# Altium PCB ElectroOpamps.PcbDoc
Units mm, origin at the board's own origin, x right, y up, seen from the top; angles counter-clockwise.
Board outline 46 x 32 mm, 2 copper layers (Top Layer, Bottom Layer); 10 components, 7 nets, 30 pads, 0 vias.
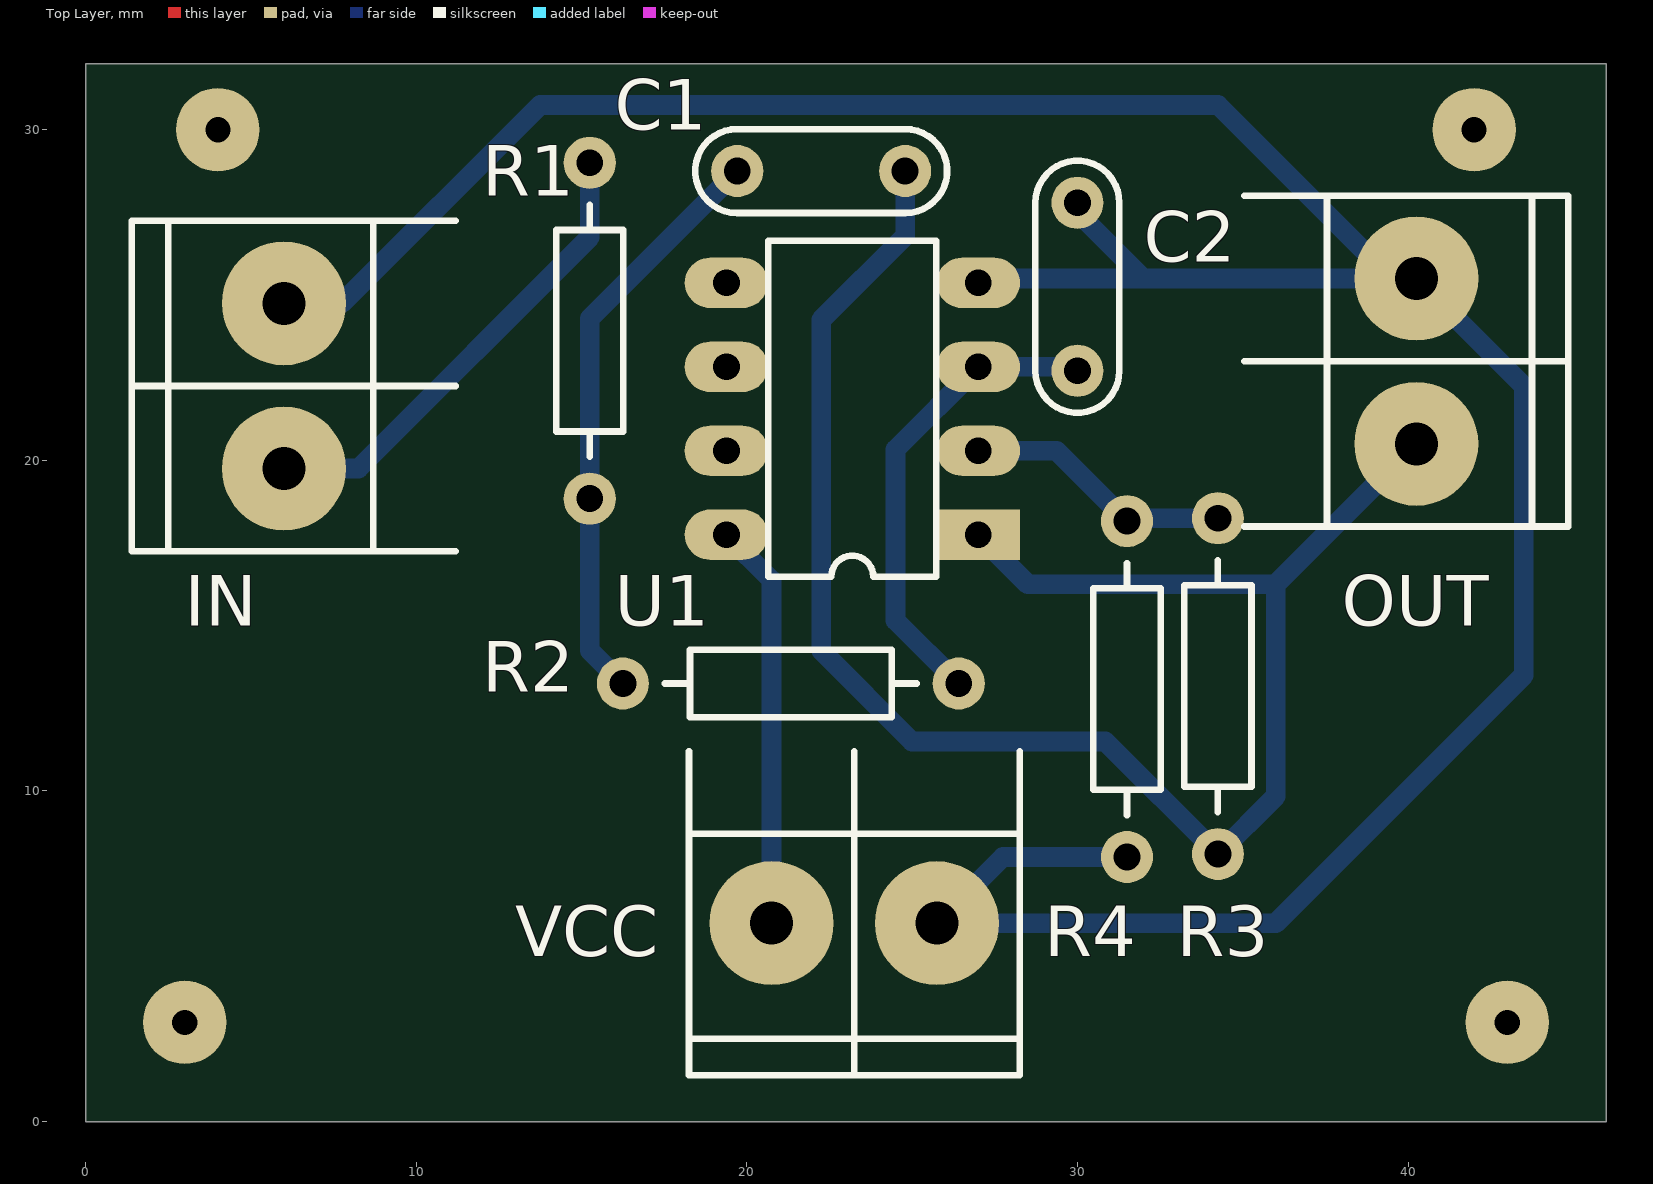
[diagram p0: Top Layer view]
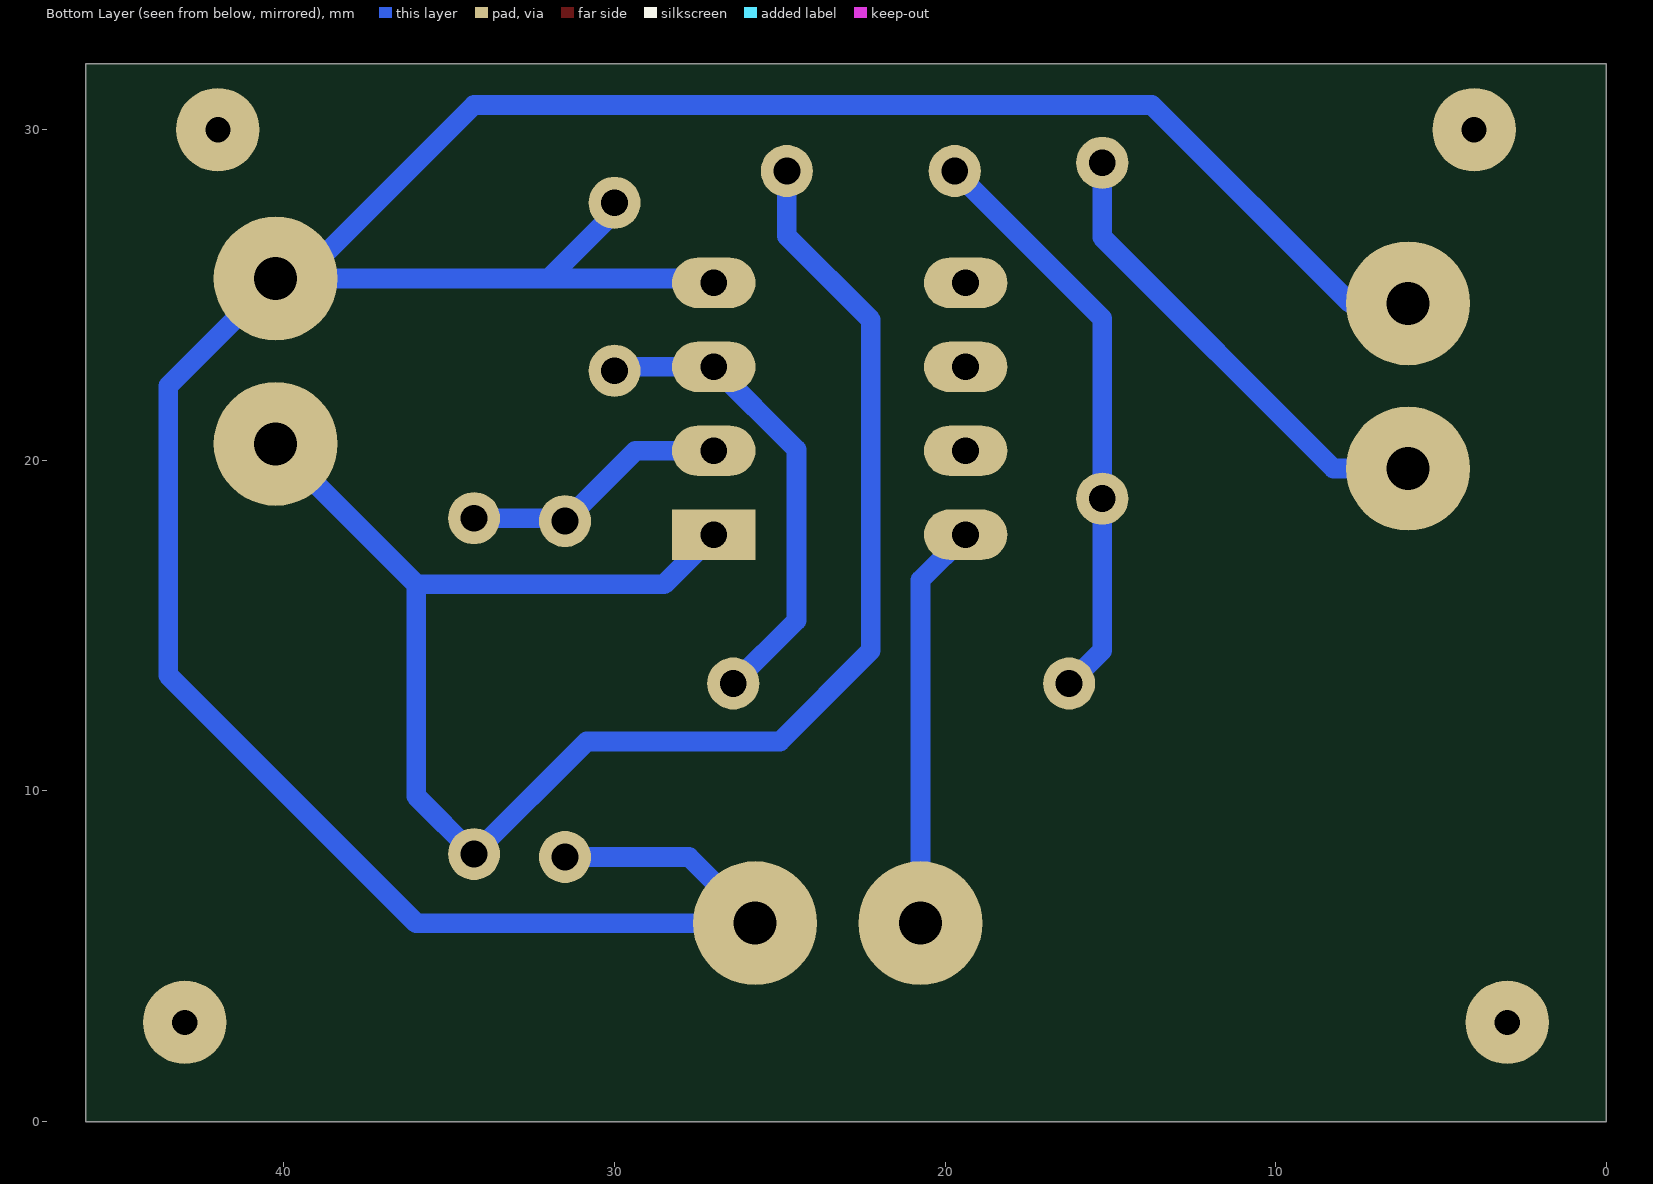
[diagram p1: Bottom Layer view, seen from below]
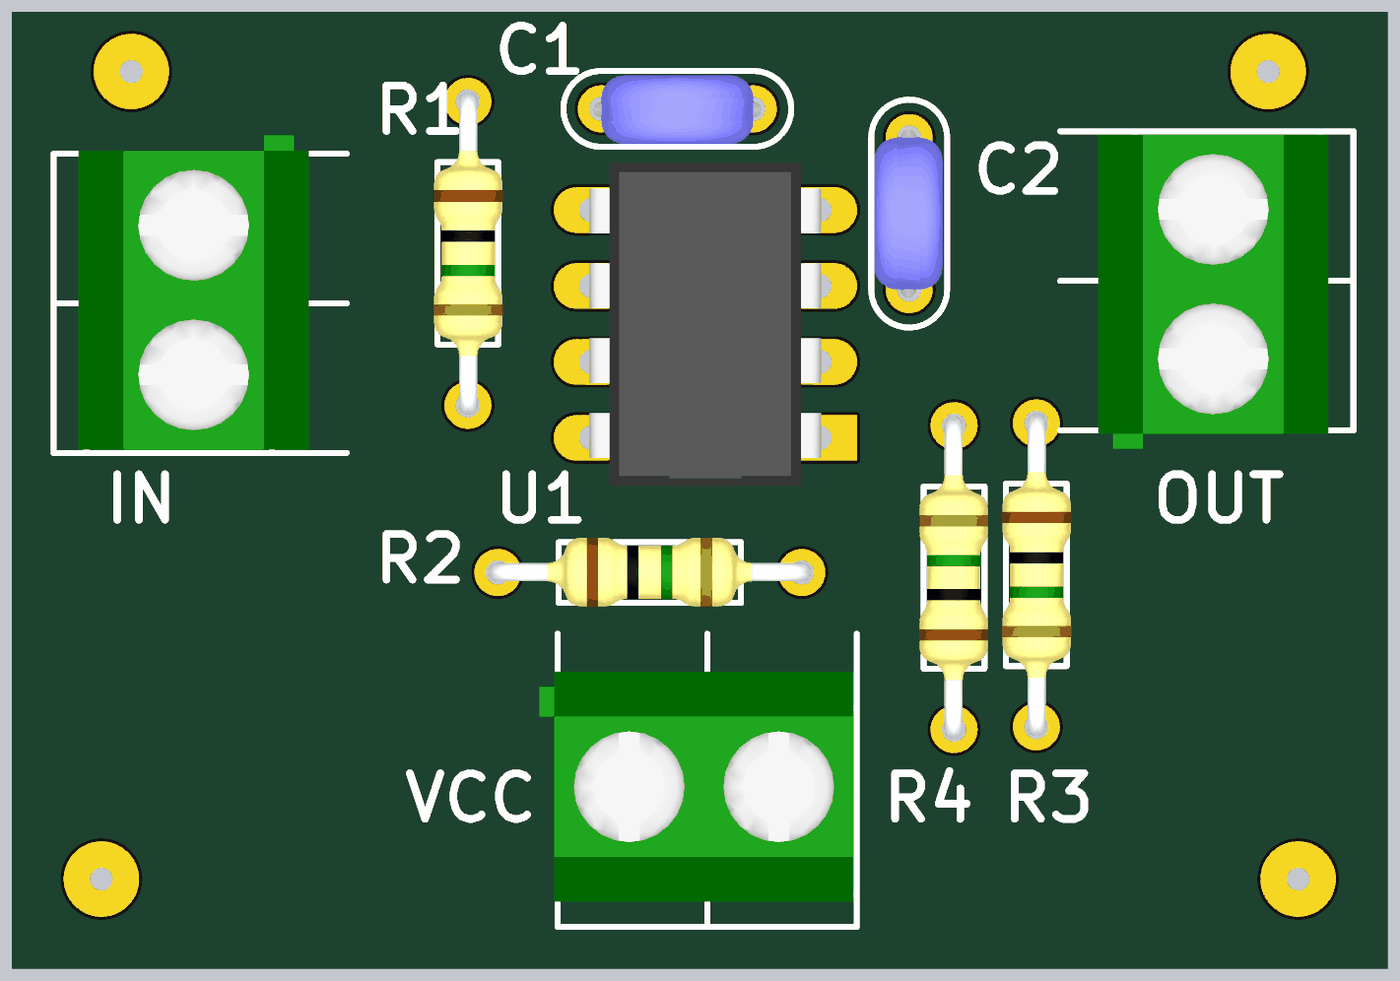
[diagram p2: 3D render of the assembled board from above, using the file's embedded part models]

## Layer stack, top to bottom
Top Solder: solder mask 0.0102, Solder Resist, Dk 3.5
Top Layer: signal copper 0.0356
Dielectric 1: dielectric 0.32, FR-4, Dk 4.8
Bottom Layer: signal copper 0.0356
Bottom Solder: solder mask 0.0102, Solder Resist, Dk 3.5

## Board outline
0,0 46,0 46,32 0,32 0,0

## Design rules (kind name [scope] priority, off if disabled: settings)
Clearance [All] p1: gap=0.3
PolygonConnect [All] p1: connectstyle=Relief reliefconductorwidth=0.254 reliefentries=4 polygonreliefangle="90 Angle" airgapwidth=0.254
RoutingVias [All] p1: holewidth=0.5 width=2 viastyle="Through Hole" minholewidth=0.5 minwidth=2 maxholewidth=0.5 maxwidth=2
SolderMaskExpansion [All] p1: expansion=0.102
Width [All] p1: maxlimit=0.6 minlimit=0.6 preferedwidth=0.6
30 further rules are at their usual default settings.

## Components (designator, comment, footprint, x,y, rotation, side; value= is the part's Value field where it differs from the comment)
C1 "10nF" CAP200 22.25,28.75 r0 top
C2 "10nF" CAP200 30,25.25 r270 top
IN "BORNERA 2" BORNERA2 6,22.25 r0 top (schematic designator B1)
OUT "BORNERA 2" BORNERA2 40.25,23 r180 top (schematic designator B2)
R1 "15k" RES400 15.25,29 r270 top
R2 "15k" RES400 16.25,13.25 r0 top
R3 "10K" RES400 34.25,18.25 r270 top
R4 "10K" RES400 31.5,8 r90 top
U1 "LM833" DIP8 27,17.75 r180 top
VCC "BORNERA 2" BORNERA2 23.25,6 r90 top (schematic designator B3)

## Footprints (in the part's own frame and the unit in brackets; to place one, negate y for a bottom-side part, rotate by r counter-clockwise, add the part's x,y. Pads: shape width x height; smd on the part's side, far side on the other; paste and mask are expansions set on the pad)
BORNERA2 [mm] "Bornera con Tornillos 5mm separación"
  round 3.75 hole 1.3: 1(0,2.5) 2(0,-2.5)
  silkscreen extent -4.6,-5 5.2,5, body extent -3.76,-4.89 3.94,5.61, height 10
CAP200 [mil]
  round 62 hole 32: 1(-100,0) 2(100,0)
  silkscreen extent -150,-50 150,50, body extent -110,-46 110,44, height 246
DIP8 [mil]
  rect 99.37x60 hole 32: 1(0,0)
  oval 99.37x60 hole 32: 2(0,-100) 3(0,-200) 5(300,-300) 6(300,-200) 7(300,-100) 8(300,0)
  oval 99.37x60 hole 32.01: 4(0,-300)
  silkscreen extent 50,-350 250,50, body extent -3,-363 303,63, height 177
RES400 [mil]
  round 62 hole 32: 1(0,0) 2(400,0)
  silkscreen extent 50,-40 350,40, body extent -12,-45 412,46, height 96

## Part data
C1 C2: library part CAP
R1 R2 R3 R4: library part RES
U1: "Dual Audio Operational Amplifier"

## Free pads (board coordinates)
  round 2.524 hole 0.762: 0(3,3) 1(43,3) 2(42,30) 3(4,30)

## Nets (pads, with @x,y where several pads share a name; then routed paths per layer and width w, separated by ;. In a path a pad name is that pad's centre, name@x,y a point inside that pad or via, vN(x,y) a via of type N, cw(c..) or ccw(c..) an arc to the next point about the centre after c; other vN are vias at no path point)
GND: C2.1 IN.1 OUT.2 R4.1 U1.4 VCC.2 | length 95.4
  Bottom Layer w0.6: IN.1 7.75,24.75 13.75,30.75 34.25,30.75 OUT.2@39.5,25.5 ; U1.4 27.13,25.5 32,25.5 ; C2.1 30,27.5 32,25.5 ; R4.1 27.75,8 VCC.2 36,6 43.5,13.5 43.5,22.25 OUT.2 OUT.2@39.5,25.5 ; 32,25.5 OUT.2@39.5,25.5
NetB1_2: IN.2 R1.1 | length 14.4
  Bottom Layer w0.6: IN.2 8.25,19.75 15.25,26.75 R1.1
NetB2_1: C1.2 OUT.1 R3.2 U1.1 | length 54.6
  Bottom Layer w0.6: C1.2 24.79,26.79 22.25,24.25 22.25,14.25 25,11.5 30.84,11.5 R3.2 36,9.84 36,16.25 ; U1.1 28.5,16.25 36,16.25 ; OUT.1 36,16.25
NetC1_1: C1.1 R1.2 R2.1 | length 17.8
  Bottom Layer w0.6: R2.1 15.25,14.25 R1.2 15.25,24.29 C1.1
NetC2_2: C2.2 R2.2 U1.3 | length 14.5
  Bottom Layer w0.6: R2.2 24.5,15.16 24.5,20.33 U1.3 29.88,22.83 C2.2
NetR3_1: R3.1 R4.2 U1.2 | length 8.2
  Bottom Layer w0.6: U1.2 29.37,20.29 R4.2 31.59,18.25 R3.1
VCC: U1.8 VCC.1 | length 12.3
  Bottom Layer w0.6: U1.8 20.75,16.38 VCC.1
pads on no net: U1.5 U1.6 U1.7